# EAGLE board 5 servo 5 pot (EAGLE 7.6.0)

Size 56.82 x 53.33 mm. Coordinates in mm from the lower left corner, seen from the top.
Outline: 0,0 56.82,0 56.82,53.33 0,53.33 0,0
Copper layers (1*16): Top 0.035mm / dielectric 1.5mm / Bottom 0.035mm
Design rules "default": minimum track width 10mil, minimum drill 24mil, track to track 8mil, track to pad 8mil, pad to pad 8mil, via to via 8mil, smd to smd 8mil, copper to edge 40mil, drill to drill 8mil, minimum pad ring 10mil, minimum via ring 8mil, stop-mask expansion 4mil, vias tented up to drill 0mil, thermal gap 10mil

## Footprints (pad centres in the part's own frame; a part is rotated, then mirrored left to right if it is on the bottom)
B25V = drill 0.813 long: A 2.54,0.635; E -2.54,0.635; S 0,0.635
1X3P-2.54-2.54-11.6-3.0-BLACK-MALE = drill 0.889 pad 1.651 square: 1 0,2.54 | drill 0.889 pad 1.651: 2 0,0; 3 0,-2.54

## Placement (x,y rotation side)
Rpot1  10k‎Ω  [B25V]  5,22.78 0 top
Rpot2  10k‎Ω  [B25V]  5,48.18 0 top
Rpot3  10k‎Ω  [B25V]  5,73.58 0 top  (outside the outline)
Rpot4  nullk‎Ω  [B25V]  5,111.68 0 top  (outside the outline)
Rpot7  10k‎Ω  [B25V]  5,124.38 0 top  (outside the outline)
SERVO1  [1X3P-2.54-2.54-11.6-3.0-BLACK-MALE]  5,10.08 0 top
SERVO2  [1X3P-2.54-2.54-11.6-3.0-BLACK-MALE]  5,35.48 0 top
SERVO3  [1X3P-2.54-2.54-11.6-3.0-BLACK-MALE]  5,60.88 0 top  (outside the outline)
SERVO4  [1X3P-2.54-2.54-11.6-3.0-BLACK-MALE]  5,86.28 0 top  (outside the outline)
SERVO5  [1X3P-2.54-2.54-11.6-3.0-BLACK-MALE]  5,98.98 0 top  (outside the outline)

## Library data of the parts
Rpot1-Rpot4 Rpot7 SERVO1-SERVO5 = AUTODESK_CIRCUITS_BREADBOARD

## Nets
N$1: Rpot2.S
N$2: SERVO3.3
N$3: Rpot3.S
N$4: Rpot1.S
N$5: SERVO1.3
N$6: SERVO2.3
N$7: Rpot4.S
N$8: SERVO4.3
N$9: SERVO5.3
N$10: Rpot7.S
N$11: Rpot1.E Rpot2.E Rpot3.E Rpot4.E Rpot7.E SERVO1.2 SERVO2.2 SERVO3.2 SERVO4.2 SERVO5.2
N$12: Rpot1.A Rpot2.A Rpot3.A Rpot4.A Rpot7.A SERVO1.1 SERVO2.1 SERVO3.1 SERVO4.1 SERVO5.1

## Tracks (layer width: path | path; a pad name or v marks a point on that pad's centre or on a via)
N$11  (9 unrouted)
N$12  (9 unrouted)